# EAGLE board M_C_ext_main_cp2102N (EAGLE 9.6.2)
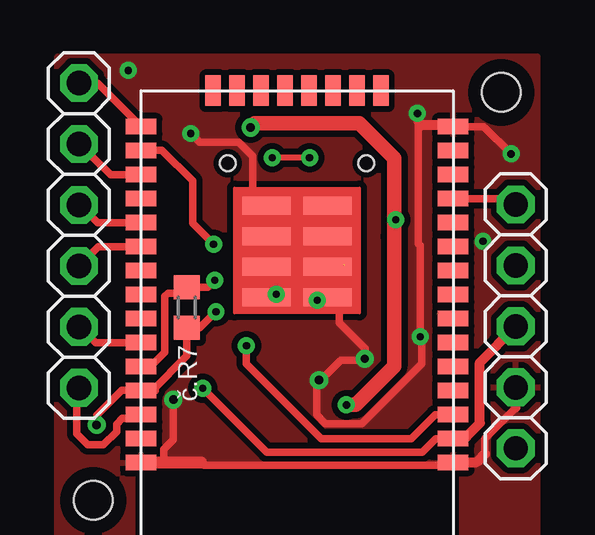
[diagram p0: board, top side]
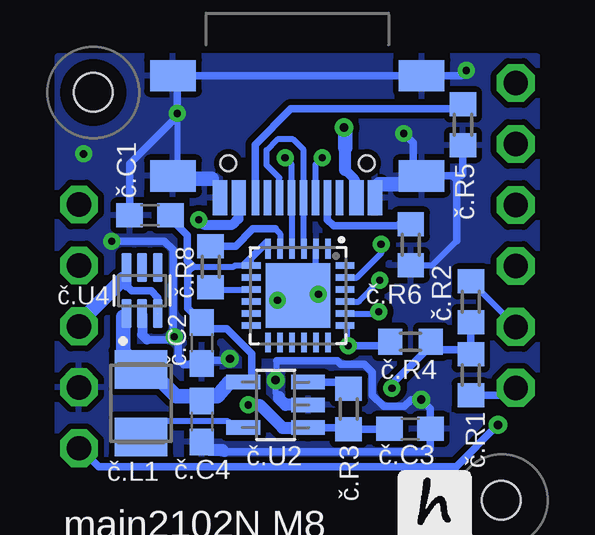
[diagram p1: board, bottom side, seen from below]

No outline drawn. Coordinates in mm, seen from the top.
Copper layers (1*16): Top 0.035mm / dielectric 1.5mm / Bottom 0.035mm
Design rules "default *": minimum track width 10mil, minimum drill 0.3mm, track to track 6mil, track to pad 6mil, pad to pad 6mil, via to via 10mil, smd to smd 10mil, copper to edge 10mil, drill to drill 40mil, minimum pad ring 10mil, minimum via ring 8mil, stop-mask expansion 4mil, vias tented up to drill 0.4mm, thermal gap 10mil
Holes 1.6 mm at 2,2 19,19
tRestrict: area 18,18 to 20,20; area 1,1 to 3,3
bRestrict: area 1,1 to 3,3; area 18,18 to 20,20

## Footprints (pad centres in the part's own frame; a part is rotated, then mirrored left to right if it is on the bottom)
1X06 = drill 1.016 pad 1.575 octagon: 1 -6.35,0; 2 -3.81,0; 3 -1.27,0; 4 1.27,0; 5 3.81,0; 6 6.35,0
1X05 = drill 1.016 pad 1.575 octagon: 1 -5.08,0; 2 -2.54,0; 3 0,0; 4 2.54,0; 5 5.08,0
USB-C = smd 0.6 x 1.45: A1B12 -3.235,3.825; A4B9 -2.46,3.825; B1A12 3.215,3.825; B4A9 2.44,3.825 | smd 0.3 x 1.45: A5 -1.26,3.825; A6 -0.26,3.825; A7 0.24,3.825; A8 1.24,3.825; B5 1.74,3.825; B6 0.74,3.825; B7 -0.76,3.825; B8 -1.76,3.825 | smd 1.9 x 1.3: SH1 -5.18,2.91; SH2 -5.18,-1.27; SH3 5.18,-1.27; SH4 5.18,2.91 | hole 0.65: 2.88,2.38; -2.9,2.38
C0603 = smd 1.1 x 1: 1 -0.85,0; 2 0.85,0
L3230M = smd 1.6 x 2.2: 1 -1.4,0; 2 1.4,0
R0603 = smd 1 x 1.1: 1 -0.85,0; 2 0.85,0
QFN50P400X400X80-25N = smd 0.81 x 0.26: 1 -1.955,1.25; 2 -1.955,0.75; 3 -1.955,0.25; 4 -1.955,-0.25; 5 -1.955,-0.75; 6 -1.955,-1.25; 13 1.955,-1.25; 14 1.955,-0.75; 15 1.955,-0.25; 16 1.955,0.25; 17 1.955,0.75; 18 1.955,1.25 | smd 0.26 x 0.81: 7 -1.25,-1.955; 8 -0.75,-1.955; 9 -0.25,-1.955; 10 0.25,-1.955; 11 0.75,-1.955; 12 1.25,-1.955; 19 1.25,1.955; 20 0.75,1.955; 21 0.25,1.955; 22 -0.25,1.955; 23 -0.75,1.955; 24 -1.25,1.955 | smd 2.68 x 2.68: 25 0,0
SOT32-5 = smd 0.6 x 1.4: BP 0.95,1.35; GND 0,-1.35; SHDN 0.95,-1.35; VIN -0.95,-1.35; VOUT -0.95,1.35
TTGO-MICRO-32 = smd 1.27 x 0.635: 3V3 -6.5,5; EN -6.5,4; GND1 -6.5,6; GND2 -6.5,-8; GND3 6.5,6; IO0 6.5,-7; IO2 6.5,-8; IO4 6.5,-6; IO5 6.5,-3; IO12 -6.5,-7; IO14 -6.5,-6; IO16 6.5,-5; IO17 6.5,-4; IO18 6.5,-2; IO19 6.5,-1; IO21 6.5,1; IO22 6.5,4; IO23 6.5,5; IO25 -6.5,-3; IO26 -6.5,-4; IO27 -6.5,-5; IO32 -6.5,-1; IO33 -6.5,-2; IO34 -6.5,1; IO35 -6.5,0; NC 6.5,0; RXD0 6.5,2; TXD0 6.5,3; VN -6.5,2; VP -6.5,3 | smd 0.635 x 1.27: CLK 0.5,-9.5; CMD -0.5,-9.5; IO13 -3.5,-9.5; IO15 3.5,-9.5; SD0 1.5,-9.5; SD1 2.5,-9.5; SD2 -2.5,-9.5; SD3 -1.5,-9.5 | smd 2.032 x 0.762: GND4 -1.27,-0.889; GND5 1.27,-0.889; GND6 -1.27,-2.159; GND7 1.27,-2.159; GND8 -1.27,-3.429; GND9 -1.27,-4.699; GND10 1.27,-3.429; GND11 1.27,-4.699
SOT65P210X110-6N = smd 1.19 x 0.4: 1 -0.96,0.65; 2 -0.96,0; 3 -0.96,-0.65; 4 0.96,-0.65; 5 0.96,0; 6 0.96,0.65

## Placement (x,y rotation side)
C.J2  [1X06]  1.4,13.04 90 top
JP1  [1X05]  19.6,9.25 270 top
U$1  USB-C  [USB-C]  10.5,18.43 180 bottom
č.C1  100n  [C0603]  16.64,13.88 0 bottom
č.C2  4u7  [C0603]  14.48,8.56 270 bottom
č.C3  4k7  [C0603]  5.8,4.98 180 bottom
č.C4  10u  [C0603]  14.48,5.29 270 bottom
č.L1  2u2  [L3230M]  17.01,6.05 90 bottom
č.R1  2k2  [R0603]  3.27,7.23 90 bottom
č.R2  2k2  [R0603]  3.27,10.28 270 bottom
č.R3  100k  [R0603]  8.36,5.81 270 bottom
č.R4  100k  [R0603]  5.78,8.61 0 bottom
č.R5  5K1  [R0603]  3.6,17.65 90 bottom
č.R6  5k1  [R0603]  5.77,12.65 90 bottom
č.R7  4k7  [R0603]  5.89,10.03 90 top
č.R8  1k  [R0603]  14.11,11.73 90 bottom
č.U1  CP2102N  [QFN50P400X400X80-25N]  10.46,10.53 270 bottom
č.U2  LM3671_3.3  [SOT32-5]  11.4,5.98 90 bottom
č.U3  TTGO-MICRO-32  [TTGO-MICRO-32]  10.49,9.58 180 top
č.U4  LM66100DCKR  [SOT65P210X110-6N]  16.97,10.74 90 bottom

## Library data of the parts
C.J2 JP1 = pinhead2
U$1 č.U3 = hugo
č.C1-č.C4 = rcl; SPICEPREFIX: C
č.L1 = rcl; SPICEPREFIX: L
č.R1-č.R8 = rcl; SPICEPREFIX: R
č.U1 = CP2104; AVAILABILITY: Unavailable; DESCRIPTION: USB Bridge, USB to UART USB 2.0 UART Interface 24-QFN (4x4); MF: Silicon Labs; MP: CP2104; PACKAGE: QFN-24 Silicon Labs; PRICE: None
č.U2 = !stavebnice03
č.U4 = LM66100DCKR; AVAILABILITY: In Stock; CHECK_PRICES: https://www.snapeda.com/parts/LM66100DCKR/Texas+Instruments/view-part/?ref=eda; DESCRIPTION: 1.5-V to 5.5-V, 1.5-A, 0.5-µA IQ ideal diode with integrated FET; MF: Texas Instruments; MP: LM66100DCKR; PACKAGE: SOT-SC70-6 Texas Instruments; PRICE: None; SNAPEDA_LINK: https://www.snapeda.com/parts/LM66100DCKR/Texas+Instruments/view-part/?ref=snap

## Nets
GND: JP1.4 U$1.A1B12 U$1.B1A12 U$1.SH1 U$1.SH2 U$1.SH3 U$1.SH4 č.C1.1 č.C2.2 č.C3.1 č.C4.2 č.R5.1 č.R6.1 č.U1.2 č.U1.25 č.U2.GND č.U3.GND1 č.U3.GND2 č.U3.GND3 č.U3.GND4 č.U3.GND5 č.U3.GND6 č.U3.GND7 č.U3.GND8 č.U3.GND9 č.U3.GND10 č.U3.GND11 č.U4.2
N$1: U$1.A7 U$1.B7 č.U1.4
N$2: U$1.A6 U$1.B6 č.U1.3
N$3: U$1.A5 č.R6.2
N$4: U$1.B5 č.R5.2
N$6: C.J2.6 č.U3.IO2
N$7: JP1.1 č.U3.IO27
N$8: č.R8.2 č.U1.5
N$10: č.L1.1 č.U2.VOUT
N$11: č.R3.1 č.U2.SHDN
N$12: C.J2.5 č.U3.IO4
N$13: C.J2.4 č.U3.IO17
N$14: C.J2.3 č.U3.IO5
N$16: č.R8.1 č.U1.9
PROG: č.U1.23 č.U3.IO0
RESET: č.R4.1 č.U1.19 č.U3.EN
RX: JP1.5 č.R7.1 č.U1.20 č.U3.TXD0
SCL: C.J2.1 č.R1.1 č.U3.IO22
SDA: C.J2.2 č.R2.1 č.U3.IO21
TX: č.R7.2 č.U1.21 č.U3.RXD0
VCC: JP1.3 č.R1.2 č.R2.2 č.R4.2 č.U3.3V3 č.U4.3 č.U4.6
VCC1: č.C1.2 č.C2.1 č.C4.1 č.L1.2 č.U1.6 č.U1.7 č.U2.BP č.U4.1
VUSB: U$1.A4B9 U$1.B4A9 č.C3.2 č.R3.2 č.U2.VIN

## Tracks (layer width: path | path; a pad name or v marks a point on that pad's centre or on a via)
GND  (via drill 0.3, 0.35)
  Top 0.254: 9.75,10.46 10.13,10.84 10.47,10.84 11.1,10.21 | 9.42,10.46 9.17,10.21 | č.U3.GND9 č.U3.GND8
  Top 0.305: 15.65,17.63 15.51,17.77 v15.51,18.12 | 16.94,17.63 č.U3.GND2 18.26,17.58 v19.41,16.43 | č.U3.GND3 | v15.51,18.12 15.51,17.97 | 6.15,17.38 v6.07,17.29 6.43,16.92 8.06,16.92 8.65,16.33 8.65,14.79 9.73,13.71 9.73,12.76 9.73,11.43 9.73,10.13 | 11.2,11.6 9.73,10.13 | 9.73,10.13 9.73,10.06 8.23,10.06 | 12.32,10.26 12.24,10.26 | 12.24,10.26 11.15,10.26 11.1,10.21 9.17,10.21 | 9.75,10.46 9.42,10.46 č.U3.GND5 | 12.04,12.73 č.U3.GND8 | č.U3.GND6 11.76,12.45 12.04,12.73 | 12.04,12.73 12.06,12.75 | č.U3.GND1 16.88,3.46 6.6,3.46 6.49,3.57 | 12.24,10.26 12.24,9.4 13.34,8.31 13.34,7.85 12.32,7.85 11.48,7.01 v11.4,7.01 11.3,6.91 11.3,5.56 11.67,5.19 13.18,5.19 15.68,7.68 15.68,8.76 v15.62,8.81 15.62,12.62 15.54,12.7 15.54,18.09 v15.51,18.12 | 5.13,3.65 5.21,3.57 | 4.93,3.57 4.93,4.13 5.33,4.54 v5.33,6.2 | 18.31,3.93 18.31,4.58 19.6,5.86
  Top 0.406: 16.94,17.63 15.65,17.63 | č.U3.GND1 17.01,3.6 17.98,3.6 18.31,3.93 | 19.6,5.86 JP1.4
  Top 0.508: 6.49,3.57 5.21,3.57 4.93,3.57 č.U3.GND3 | č.U3.GND1 16.95,3.61 | č.U3.GND10 9.48,13.01 9.73,12.76 | č.U3.GND7 9.42,11.73 9.73,11.43
  Bottom 0.254: v15.51,18.12 15.51,15.57 U$1.SH4 | č.U1.2 9.73,12.47 9.75,10.59 v9.62,10.59 10.41,10.59 č.U1.25 10.87,10.94 | č.R6.1 4.88,11.8 3.86,12.82 | 11.25,6.32 11.4,6.47 v11.4,7.01 11.35,7.06 11.35,7.83
  Bottom 0.305: 15.49,18.12 v15.51,18.12 | U$1.A1B12 7.26,15.01 7.24,15.01 | 7.09,15.18 7.09,15.01 7.24,15.01 | 7.24,15.01 7.24,14.82 | v6.07,17.29 5.68,16.9 5.68,15.4 | v15.51,18.12 15.51,19.65 U$1.SH3 U$1.SH2 3.67,19.7 v3.45,19.91 3.54,19.83 3.53,19.72 | 15.32,15.52 U$1.SH4 15.37,15.52 15.24,15.39 | U$1.SH1 5.76,15.18 | 10.68,10.74 č.U1.25 | 10.87,10.94 10.27,11.54 | 15.56,18.07 v15.51,18.12 | U$1.B1A12 13.71,15.05 14.06,15.39 | 3.86,12.82 3.86,15.36 4.02,15.52 U$1.SH1 | č.U2.GND 9.93,5.85 | 16.76,8.7 15.67,8.7 15.67,8.76 v15.62,8.81 | č.C4.2 14.15,4.11 | 13.53,4.03 5.07,4.03 4.95,4.14 č.C3.1 4.95,5.82 v5.33,6.2 5.76,6.2 6.04,5.92 6.9,5.92 7.37,6.39 7.37,7.34 7.71,7.68 8.7,7.68 8.84,7.83 11.35,7.83 | U$1.SH1 3.66,15.52 3.6,15.59 č.R5.1 | č.C1.1 17.49,16.03 15.51,18.01 v15.51,18.12 | 14.91,7.71 č.C2.2 | v15.62,8.81 15.47,8.66 15.47,7.9 15.23,7.66 14.96,7.66 14.91,7.71 | 13.36,7.85 14.77,7.85 14.91,7.71 | v18.24,12.8 v18.23,12.81 16.05,12.81 15.67,12.43 15.67,8.87 v15.62,8.81
  Bottom 0.406: 13.62,4.11 13.53,4.03 | č.U4.2 16.97,8.91 16.76,8.7
  Bottom 0.508: č.U1.25 10.58,10.64 10.92,10.64 | č.U2.GND 10.99,5.98 11.25,6.24 11.25,6.32 | 14.15,4.11 13.62,4.11
  Bottom 0.61: 14.06,15.39 15.24,15.39 | 5.76,15.18 7.09,15.18
  other vias: 11.33,10.34 13.31,7.9
  pour Top (isolate 0.254): 0.5,0.5 0.5,20.5 20.5,20.5 20.5,0.5
  pour Bottom (isolate 0.254): 0.5,20.5 20.5,20.5 20.5,0.5 0.5,0.5
N$1  (via drill 0.3)
  Top 0.254: v11.01,16.28 v9.46,16.28
  Top 0.305: v11.01,16.28
  Bottom 0.254: U$1.B7 9.74,15.99 9.72,16.02 v9.46,16.28 | U$1.A7 10.74,16 v11.01,16.28 | U$1.A7 | U$1.A7 10.74,14.91 | U$1.A7 10.74,12.51 č.U1.4
N$2
  Bottom 0.254: č.U1.3 10.25,12.52 U$1.A6 10.24,16.61 10.68,17.04 11.33,17.04 11.78,16.59 11.78,15.97 11.25,15.44 11.25,14.61 U$1.B6
N$3
  Bottom 0.305: U$1.A5 9.25,13.7 8.99,13.45 6.3,13.45 6.25,13.5 č.R6.2
N$4
  Bottom 0.305: U$1.B5 12.26,14.62 12.26,16.82 10.77,18.32 3.78,18.32 č.R5.2
N$6
  Top 0.305: č.U3.IO2 2.18,19.39 C.J2.6
N$7
  Top 0.305: č.U3.IO27 19.33,14.58 JP1.1
N$8
  Bottom 0.254: č.R8.2 13.85,12.84 | 11.41,13.31 11.21,13.11 č.U1.5
  Bottom 0.305: 11.41,13.31 12.35,13.31 13.07,12.59 č.R8.2
N$10
  Bottom 0.254: č.U2.VOUT 13.12,5.03 13.38,5.29 16.36,5.29 č.L1.1
  Bottom 0.305: 12.78,5.03 č.U2.VOUT
  Bottom 0.508: 16.87,4.79 č.L1.1 | č.U2.VOUT 12.76,5.04
N$11
  Bottom 0.305: č.U2.SHDN 8.64,6.93 č.R3.1
N$12
  Top 0.305: č.U3.IO4 2.72,15.58 C.J2.5
N$13
  Top 0.305: č.U3.IO17 2.18,13.58 C.J2.4
N$14
  Top 0.305: č.U3.IO5 2.21,12.58 C.J2.3
N$16
  Bottom 0.254: 14.01,10.78 č.U1.9
  Bottom 0.305: č.R8.1 14.01,10.78
PROG  (via drill 0.3)
  Top 0.305: č.U3.IO0 4.32,16.58 4.33,16.59 4.86,16.59 6.13,15.31 6.13,13.55 v7.01,12.67
  Bottom 0.254: č.U1.23 8.02,11.29 7.01,12.29 v7.01,12.67
RESET  (via drill 0.3)
  Top 0.305: č.U3.EN 16.25,5.58 15.25,4.57 11.5,4.57 8.38,7.69 v8.38,8.44
  Bottom 0.254: č.U1.19 8.43,9.28 8.43,8.49 v8.38,8.44
  Bottom 0.305: č.R4.1 6.8,8.44 v8.38,8.44
RX  (via drill 0.3, 0.35)
  Top 0.305: č.U3.TXD0 4.01,6.56 4.57,6.56 | v7.11,9.85 6.44,9.18 č.R7.1 5.89,8.02 4.45,6.58 č.U3.TXD0 | č.U3.TXD0 3.18,6.58 2.14,5.54 v2.14,5.14
  Bottom 0.254: č.U1.20 7.19,9.78 v7.11,9.85
  Bottom 0.305: 2.14,5.1 v2.14,5.14 3.88,3.41 18.77,3.41 19.53,4.17 JP1.5
SCL
  Top 0.305: č.U3.IO22 3.61,5.58 | č.U3.IO22 3.94,5.53 3.63,5.53 | C.J2.1 1.3,6.59 1.3,4.77 1.76,4.31 2.41,4.31 2.97,4.87 2.97,5.18 3.21,5.42 3.84,5.42 č.U3.IO22
  Bottom 0.254: 1.47,6.69 C.J2.1
  Bottom 0.305: č.R1.1 1.71,6.38 C.J2.1
SDA
  Top 0.305: č.U3.IO21 2.1,8.58 C.J2.2
  Bottom 0.254: C.J2.2 1.4,9.26 č.R2.1
TX  (via drill 0.3)
  Top 0.305: 4.05,7.64 č.U3.RXD0 4.38,7.58 4.99,8.18 4.99,10.49 5.12,10.63 5.64,10.63 č.R7.2 6.77,10.88 v7.06,11.17
  Bottom 0.254: 8.52,10.28 č.U1.21 7.94,10.28 v7.06,11.17
VCC  (via drill 0.3)  (1 unrouted)
  Top 0.305: 17,4.56 16.27,4.56 15.72,4.01 9.22,4.01 v6.56,6.68
  Top 0.406: 17,4.56 č.U3.3V3 17.06,4.65 17.54,4.65 18.11,5.21 18.11,7.74 JP1.3
  Bottom 0.254: 3.45,9.42 č.R2.2
  Bottom 0.305: 6.37,6.68 v6.56,6.68 6.56,6.83 5.11,8.28 4.83,8.28 | č.U4.6 17.62,11.45 | č.U4.3 16.31,10.45 16.59,10.73 17.4,10.73 17.62,10.95 | 4.83,8.28 3.47,8.28 č.R1.2 č.R2.2 | 4.7,8.84 č.R4.2 4.93,8.38 4.83,8.28
  Bottom 0.406: č.U4.6 17.62,11.23 | 17.62,11.23 17.62,10.95 | 17.75,11.23 17.62,11.23
  Bottom 0.61: 19.6,9.37 JP1.3 19.6,9.38 17.75,11.23
VCC1  (1 unrouted)
  Bottom 0.254: 11.71,12.46 č.U1.6 11.71,12.64 11.8,12.73 | 12.47,11.83 12.67,11.83 12.67,11.86 | č.U1.7 12.42,12.04 | č.U1.7 12.46,11.82 | č.U1.7 13.11,11.78 13.14,11.74 14.83,11.74 15.07,11.5 | 12.62,7.06 č.U2.BP
  Bottom 0.305: č.U4.1 17.74,9.66 | 12.67,11.86 11.8,12.73 | 15.07,11.5 15.07,10.02 14.48,9.42 č.C2.1 | 14.22,9.16 13.44,9.16 12.4,8.12 12.4,6.93 12.4,6.9 | č.C1.2 15.79,13.75 15.07,13.04 15.07,11.99 14.83,11.74
  Bottom 0.406: č.C2.1 14.22,9.16 | 12.4,6.9 12.34,6.96 | 12.4,6.93 č.U2.BP
  Bottom 0.61: 16.53,7.93 č.L1.2 | č.L1.2 16.53,6.96 16.16,6.96 15.54,6.34 14.68,6.34 č.C4.1 14.28,6.34 13.83,6.34 13.35,6.93 č.U2.BP | 17.42,7.86 č.L1.2 | 17.74,9.66 17.74,8.2 17.01,7.47 č.L1.2
VUSB  (via drill 0.3, 0.35)
  Top 0.406: v14.61,13.69 14.61,13.07 14.54,13.01
  Top 0.61: v12.55,5.98 12.93,5.98 14.53,7.58 14.54,13.01 14.54,16.25 13.08,17.71 8.73,17.71 v8.56,17.53
  Bottom 0.254: 9.98,5.1 č.U2.VIN
  Bottom 0.305: U$1.B4A9 12.89,14.65 | U$1.A4B9 8.12,14.68 | č.R3.2 8.34,4.93 | č.R3.2 6.67,4.96 č.C3.2 | č.R3.2 8.44,5.03 č.U2.VIN
  Bottom 0.406: 8.12,14.68 8.12,15.38 8.51,15.77 | U$1.B4A9 12.96,14.59 12.96,13.73 13.2,13.49 14.41,13.49 v14.61,13.69
  Bottom 0.508: v12.55,5.98 12.07,5.98 11.11,5.02 10.06,5.02 | 8.51,15.77 8.51,16.68
  Bottom 0.61: č.U2.VIN 10.06,5.02 | 8.51,16.68 8.51,17.49 v8.56,17.53

## Text on the board
bPlace: main2102N M8